# EAGLE board Front Node_MiniLock (EAGLE 8.1.0)
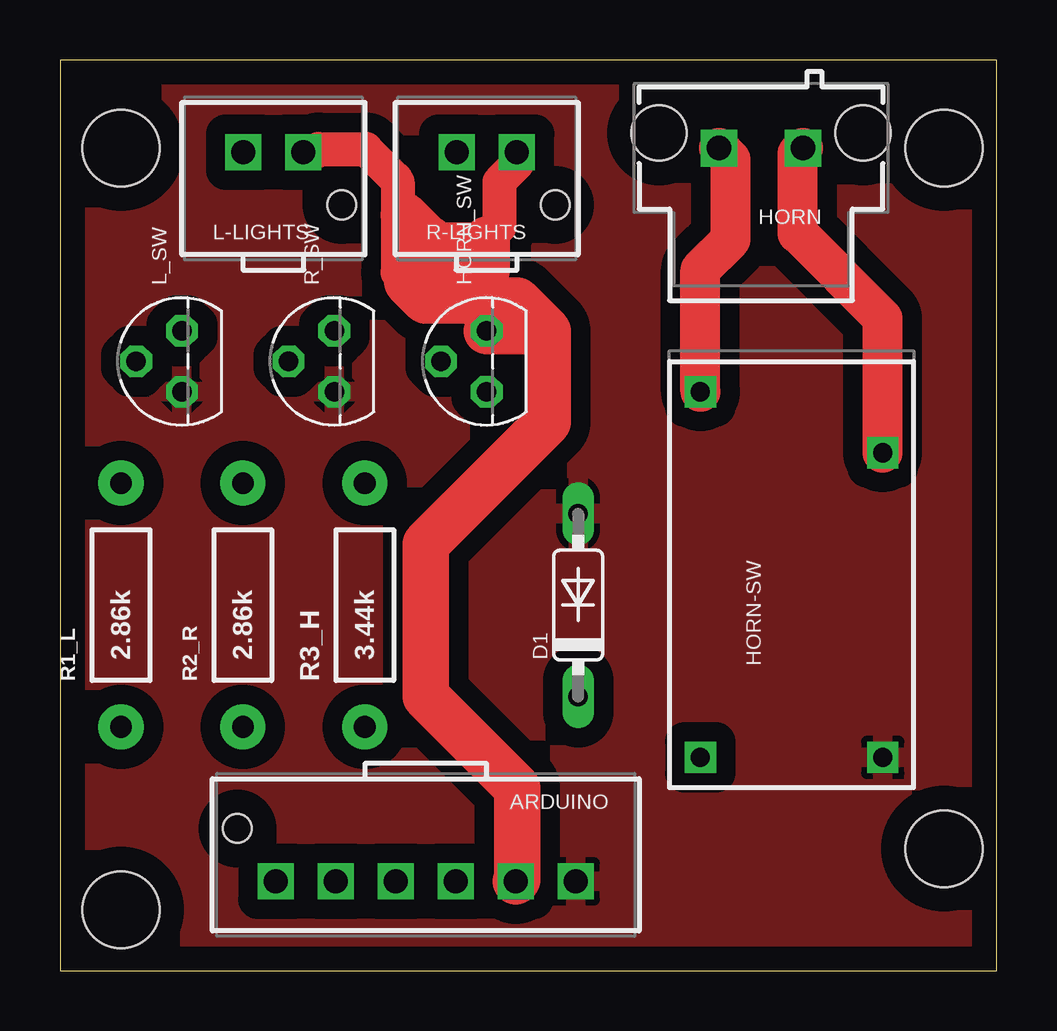
[diagram p0: board, top side]
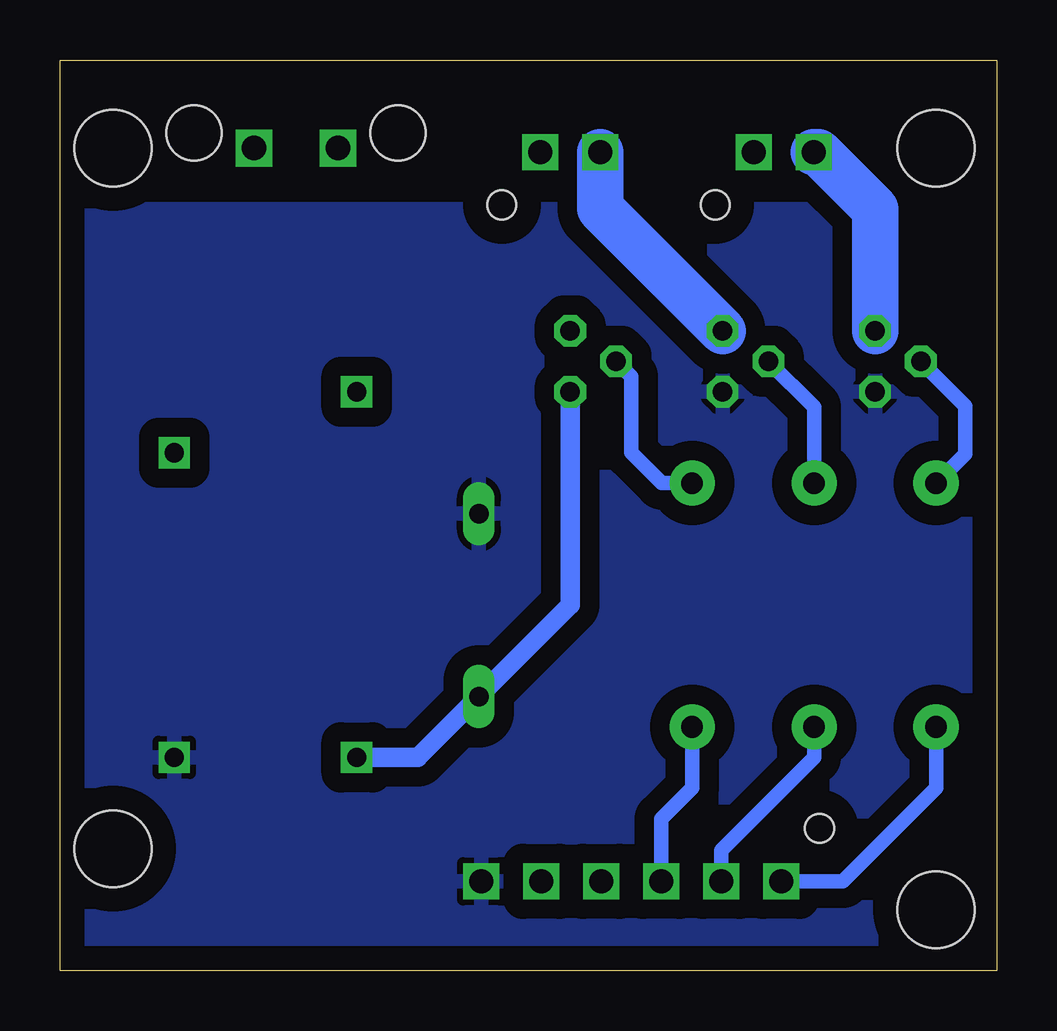
[diagram p1: board, bottom side, seen from below]

Size 39.04 x 37.96 mm. Coordinates in mm from the lower left corner, seen from the top.
Outline: 0,0 39.04,0 39.04,37.96 0,37.96 0,0
Copper layers (1*16): Top 0.035mm / dielectric 1.5mm / Bottom 0.035mm
Design rules "default": minimum track width 10mil, minimum drill 24mil, track to track 8mil, track to pad 8mil, pad to pad 8mil, via to via 8mil, smd to smd 8mil, copper to edge 40mil, drill to drill 8mil, minimum pad ring 10mil, minimum via ring 8mil, stop-mask expansion 4mil, vias tented up to drill 0mil, thermal gap 10mil
Holes 3.2 mm at 2.54,34.29 2.54,2.54 36.83,5.08 36.83,34.29
tKeepout: area -1.3,38.1 to 40.6,39.4; area 39.4,-1.3 to 40.6,38.1; area -1.3,-1.3 to 40.6,0; area -1.3,0 to 0,39.4

## Footprints (pad centres in the part's own frame; a part is rotated, then mirrored left to right if it is on the bottom)
53375-0610-MINI-LOCK = drill 1 square: P$1 6.25,1.1; P$2 3.75,1.1; P$3 1.25,1.1; P$4 -1.25,1.1; P$5 -3.75,1.1; P$6 -6.25,1.1 | hole 1.2: 7.85,-1.1
DO35-7 = drill 0.813 long: A 3.81,0; C -3.81,0
172287-ULTRA-FIT = drill 1.02 square: 1 -1.75,0; 2 1.75,0 | hole 2.3: -4.25,-0.63; 4.25,-0.63
OJE-SS-112HM2-SPST-RELAY = drill 0.8 square: C+ -6.35,3.8; C- -6.35,-3.8; COM 8.89,3.8; NO 6.35,-3.8
TO92 = drill 0.813 octagon: 1 1.27,0; 2 0,1.905; 3 -1.27,0
53375-0210-MINI-LOCK = drill 1 square: P$1 1.25,1.1; P$2 -1.25,1.1 | hole 1.2: 2.85,-1.1
AXIAL-0.4 = drill 0.9 pad 1.88: P$1 -5.08,0; P$2 5.08,0

## Placement (x,y rotation side)
ARDUINO  53375-0610  [53375-0610-MINI-LOCK]  15.24,4.83 180 top
D1  1N4148DO35-7  [DO35-7]  21.59,15.24 90 top
HORN  172287-11-02  [172287-ULTRA-FIT]  29.21,34.29 180 top
HORN-SW  OJE-SS-112HM2  [OJE-SS-112HM2-SPST-RELAY]  30.48,15.24 90 top
HORN_SW  2N3904  [TO92]  17.78,25.4 90 top
L-LIGHTS  53375-0210  [53375-0210-MINI-LOCK]  8.89,33.02 0 top
L_SW  2N3904  [TO92]  5.08,25.4 90 top
R1_L  2.86k  [AXIAL-0.4]  2.54,15.24 90 top
R2_R  2.86k  [AXIAL-0.4]  7.62,15.24 90 top
R3_H  3.44k  [AXIAL-0.4]  12.7,15.24 90 top
R-LIGHTS  53375-0210  [53375-0210-MINI-LOCK]  17.78,33.02 0 top
R_SW  2N3904  [TO92]  11.43,25.4 90 top

## Library data of the parts
ARDUINO HORN HORN-SW L-LIGHTS R-LIGHTS = Hooman
D1 = diode
HORN_SW L_SW R_SW = transistor-neu-to92
R1_L R2_R R3_H = SparkFun-Passives

## Nets
ARDUINO_L: ARDUINO.P$1 R1_L.P$1
ARDUINO_R: ARDUINO.P$2 R2_R.P$1
COM: HORN-SW.COM HORN.2
GND: ARDUINO.P$6 D1.A HORN-SW.C- L_SW.3 R_SW.3
HORNSWITCH: ARDUINO.P$3 R3_H.P$1
L: L-LIGHTS.P$2 L_SW.1
N$1: HORN_SW.2 R3_H.P$2
N$2: R2_R.P$2 R_SW.2
N$3: D1.C HORN-SW.C+ HORN_SW.3
N$8: L_SW.2 R1_L.P$2
NO: HORN-SW.NO HORN.1
R: R-LIGHTS.P$2 R_SW.1
VCC: ARDUINO.P$5 HORN_SW.1 L-LIGHTS.P$1 R-LIGHTS.P$1

## Tracks (layer width: path | path; a pad name or v marks a point on that pad's centre or on a via)
ARDUINO_L
  Bottom 0.61: ARDUINO.P$1 6.43,3.73 2.54,7.62 R1_L.P$1
ARDUINO_R
  Bottom 0.61: ARDUINO.P$2 11.49,5.02 7.62,8.89 R2_R.P$1
COM
  Top 1.676: HORN-SW.COM 26.68,29.22 27.94,30.48 27.94,33.81 HORN.2
GND
  pour Top (isolate 0.813): 0,38.1 39.37,38.1 40.64,1.27 1.27,1.27
  pour Bottom (isolate 0.813): 0,31.75 39.37,31.75 39.37,1.27 0,1.27
HORNSWITCH
  Bottom 0.61: ARDUINO.P$3 13.99,6.33 12.7,7.62 R3_H.P$1
L
  Bottom 1.93: L-LIGHTS.P$2 7.45,34.12 5.08,31.75 L_SW.1
N$1
  Bottom 0.61: R3_H.P$2 13.97,20.32 15.24,21.59 15.24,24.77 HORN_SW.2
N$2
  Bottom 0.61: R2_R.P$2 7.62,23.5 R_SW.2
N$3
  Bottom 0.813: HORN_SW.3 17.78,15.24 D1.C 24.13,8.89 HORN-SW.C+
N$8
  Bottom 0.61: R1_L.P$2 1.32,21.54 1.32,23.55 L_SW.2
NO
  Top 1.676: HORN-SW.NO 34.28,27.19 30.73,30.73 30.73,34.06 HORN.1
R
  Bottom 1.93: R-LIGHTS.P$2 16.53,31.77 R_SW.1
VCC
  Top 1.422: L-LIGHTS.P$1 10.65,34.12 10.78,34.25 12.74,34.25 13.97,33.02 13.97,32.98 14.07,32.88 14.07,29.11 | 14.48,28.7 14.07,29.11 | R-LIGHTS.P$1 19.03,33.61 18.3,32.88 18.3,31 17.78,30.48 15.43,30.48 14.07,29.11
  Top 1.93: 20.32,26.67 20.32,22.86 15.24,17.78 15.24,11.43 19.05,7.62 19.05,3.79 ARDUINO.P$5 | 19.05,27.94 20.32,26.67 | 19.05,27.94 15.24,27.94 14.48,28.7 | 19.05,27.94 HORN_SW.1 20.32,26.67 | 17.78,30.48 17.78,29.21 15.24,29.21 | 15.43,30.48 15.34,30.48 14.32,31.5